# Altium PCB PultRE_8C.PcbDoc
Units mm, origin at the board's own origin, x right, y up, seen from the top; angles counter-clockwise.
Board outline 75.76 x 55.83 mm, 2 copper layers (Top Layer, Top, Bottom Layer, Bottom); 29 components, 23 nets, 96 pads, 11 vias.
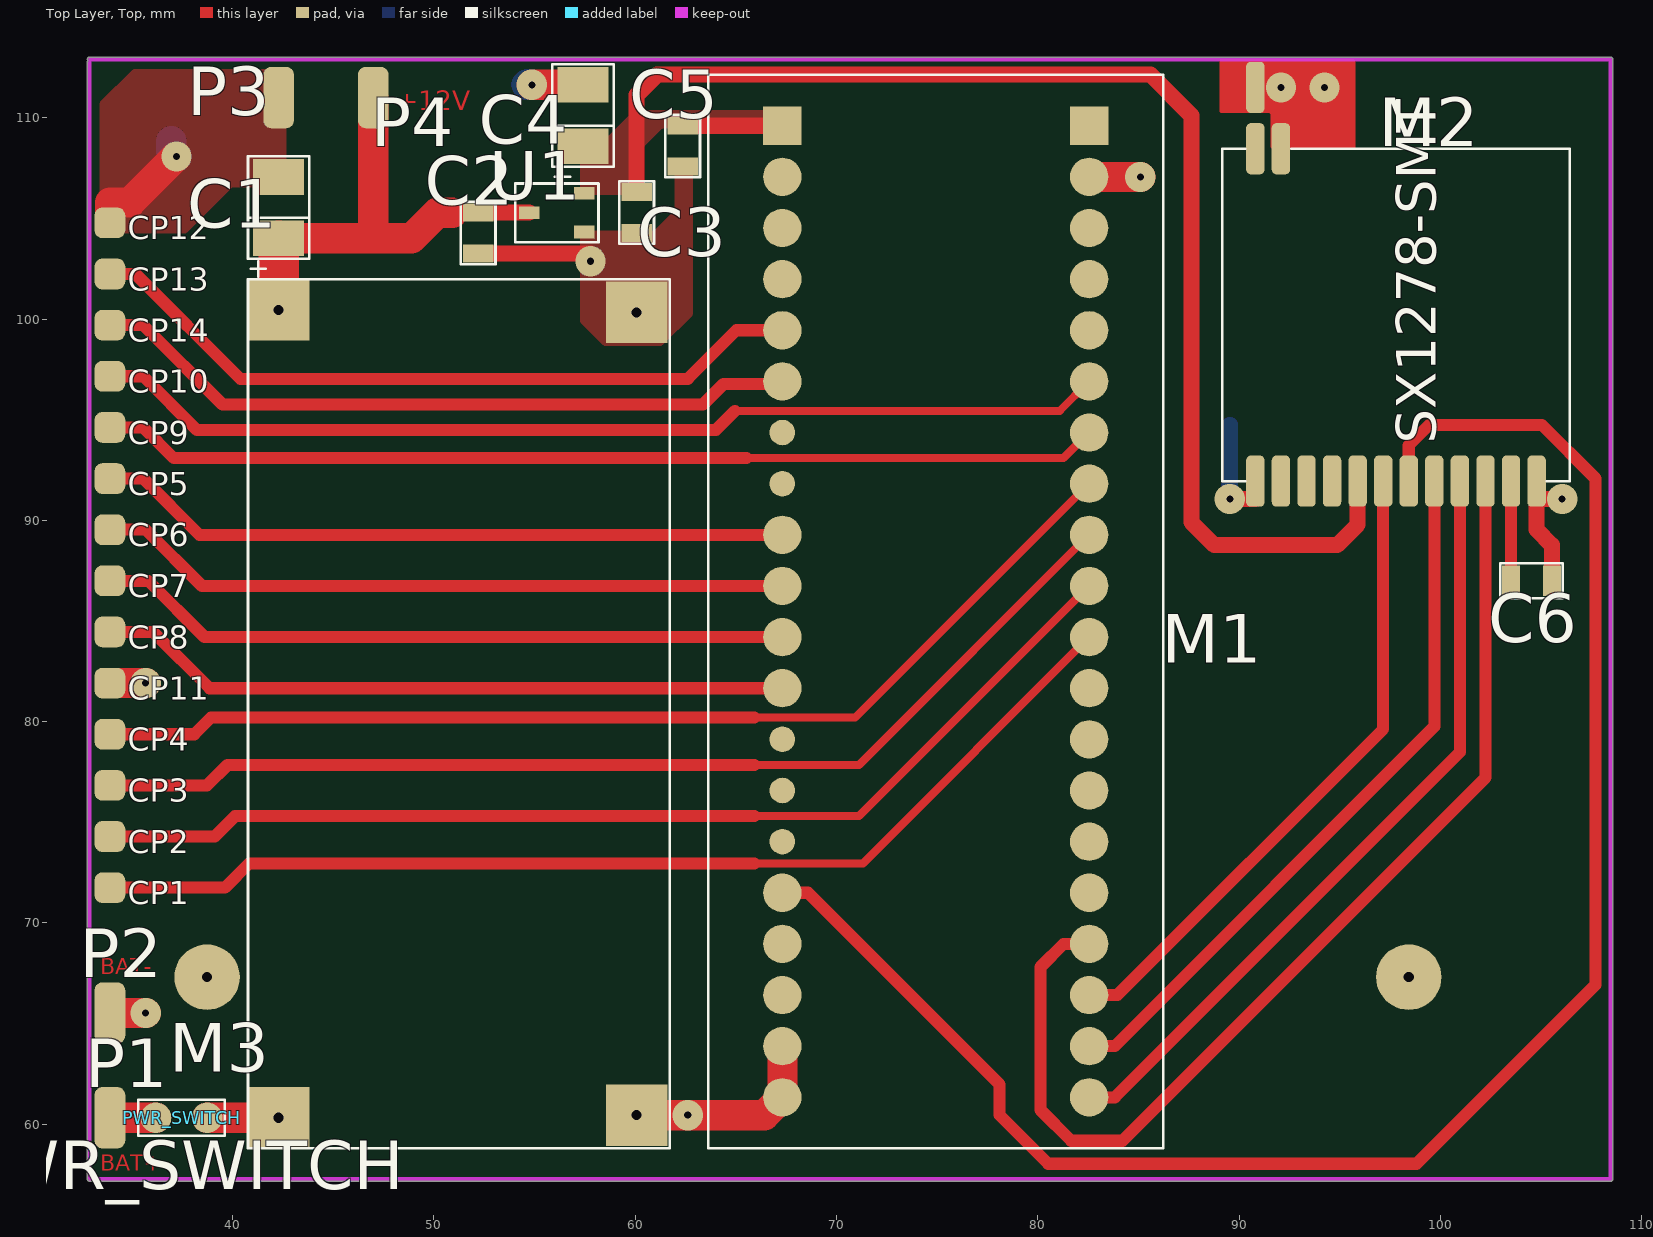
[diagram p0: Top Layer, Top view]
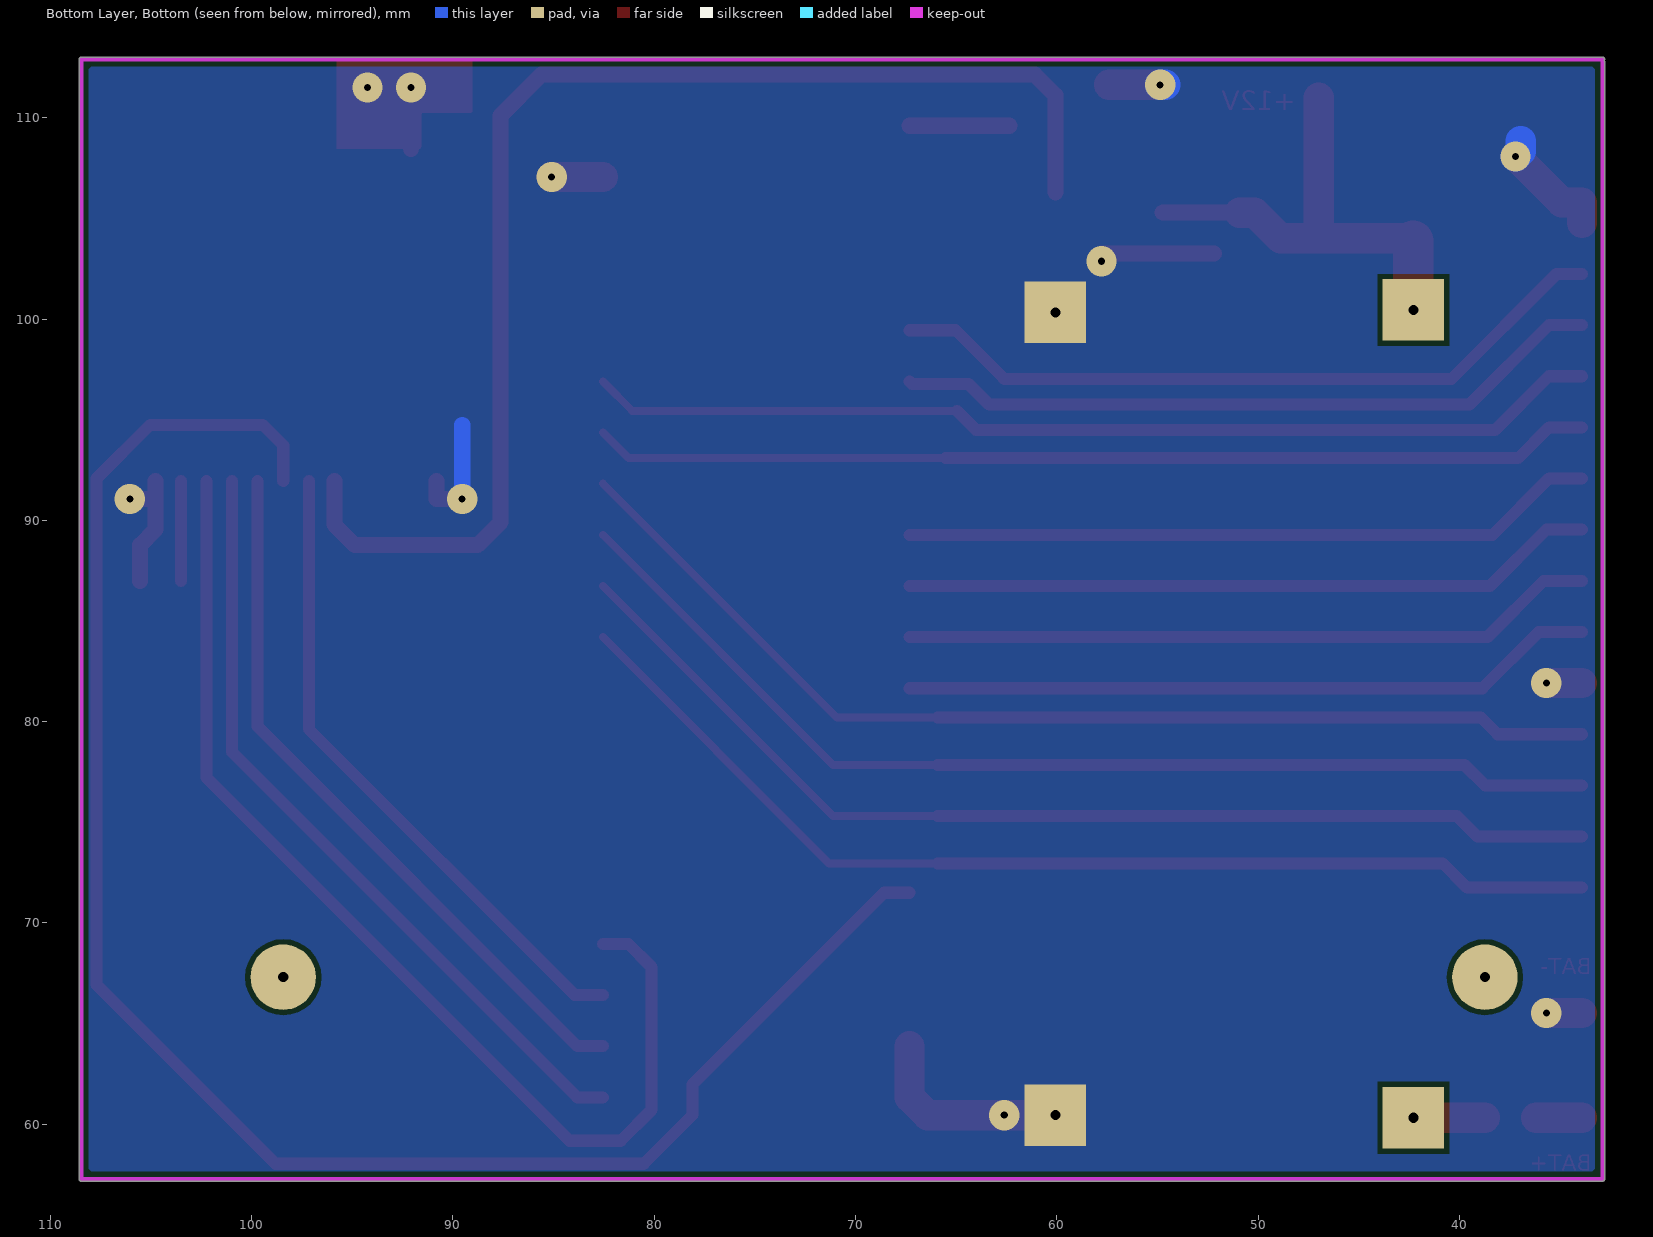
[diagram p1: Bottom Layer, Bottom view, seen from below]

## Layer stack, top to bottom
Top Solder, Top Mask: solder mask 0.0102, Solder Resist, Dk 3.5
Top Layer, Top: signal copper 0.0356
Dielectric 1: dielectric 0.32, FR-4, Dk 4.8
Bottom Layer, Bottom: signal copper 0.0356
Bottom Solder, Bot Mask: solder mask 0.0102, Solder Resist, Dk 3.5

## Board outline
32.793,57.277 32.793,112.776 cw(c32.893,112.776) 32.816,112.84 cw(c32.893,112.903) 32.893,113.003 108.458,113.003 cw(c108.458,112.903) 108.558,112.903 108.558,57.277 cw(c108.458,57.277) 108.458,57.177 32.893,57.177 cw(c32.893,57.277)

## Design rules (kind name [scope] priority, off if disabled: settings)
Clearance "Clearance_Top Layer, Top" [ExistsOnLayer('Top Layer, Top') vs ExistsOnLayer('Top Layer, Top')] p1: gap=0.15 ignorepadtopadclearanceinfootprint=FALSE except(0.2: THPad-THPad)
Clearance [All] p2: gap=0.254 ignorepadtopadclearanceinfootprint=FALSE except(0: Arc-Hole Track-Hole SMDPad-Hole THPad-Hole Via-Hole Fill-Hole Poly-Hole Region-Hole Text-Hole; 0.15: THPad-THPad; 0.2: Arc-Arc Arc-Track Arc-THPad Arc-Via Track-Track Track-THPad Track-Via THPad-Via Via-Via)
MinimumSolderMaskSliver [All] p1: minsoldermaskwidth=0
PlaneClearance [All] p1: clearance=0.254
PolygonConnect PolygonConnect_6 [IsPolygon And InNet('GND') And OnLayer('Bottom Layer, Bottom') vs IsVia] p1: connectstyle=Direct reliefconductorwidth=0.381 reliefentries=4 polygonreliefangle="90 Angle" airgapwidth=0.254
PolygonConnect PolygonConnect_5 [IsPolygon And InNet('GND') And OnLayer('Bottom Layer, Bottom') vs IsPad] p2: connectstyle=Direct reliefconductorwidth=0.381 reliefentries=4 polygonreliefangle="90 Angle" airgapwidth=0.254
PolygonConnect PolygonConnect_4 [IsPolygon And InNet('3.3V') And OnLayer('Top Layer, Top') vs IsVia] p3: connectstyle=Direct reliefconductorwidth=0.381 reliefentries=4 polygonreliefangle="90 Angle" airgapwidth=0.254
PolygonConnect PolygonConnect_3 [IsPolygon And InNet('3.3V') And OnLayer('Top Layer, Top') vs IsPad] p4: connectstyle=Direct reliefconductorwidth=0.381 reliefentries=4 polygonreliefangle="90 Angle" airgapwidth=0.254
PolygonConnect PolygonConnect_2 [IsPolygon And InNet('GND') And OnLayer('Top Layer, Top') vs IsVia] p5: connectstyle=Direct reliefconductorwidth=0.381 reliefentries=4 polygonreliefangle="90 Angle" airgapwidth=0.254
PolygonConnect PolygonConnect_1 [IsPolygon And InNet('GND') And OnLayer('Top Layer, Top') vs IsPad] p6: connectstyle=Direct reliefconductorwidth=0.381 reliefentries=4 polygonreliefangle="90 Angle" airgapwidth=0.254
PolygonConnect [All] p7: connectstyle=Relief reliefconductorwidth=0.254 reliefentries=4 polygonreliefangle="90 Angle" airgapwidth=0.254
RoutingVias [All] p1: holewidth=0.711 width=1.27 viastyle="Through Hole" minholewidth=0.711 minwidth=1.27 maxholewidth=0.711 maxwidth=1.27
SilkToSilkClearance [All] p1: silktosilkclearance=0
SilkToSolderMaskClearance [IsPad] p1: minsilkscreentomaskgap=0 clearancetoexposedcopper=TRUE
SolderMaskExpansion [All] p1: expansion=0.102 istentingtop=FALSE
Width [All] p1: maxlimit=3 minlimit=0.254 preferedwidth=0.6
26 further rules are at their usual default settings.

## Components (designator, comment, footprint, x,y, rotation, side; value= is the part's Value field where it differs from the comment)
C1 "100u" TAJHT1210 42.291,105.537 r90 top
C2 "1u" C0805 52.197,104.267 r90 top
C3 "1u" C0805 60.071,105.283 r90 top
C4 "47u" TAJHT1210 57.404,110.109 r90 top
C5 "100n" C0805 62.357,108.585 r90 top
C6 "100n" C0805 104.521,86.995 r180 top
CP1 "R1" PAD_RRX60Y60D0T 33.909,71.755 r0 top
CP2 "R2" PAD_RRX60Y60D0T 33.909,74.295 r0 top
CP3 "R3" PAD_RRX60Y60D0T 33.909,76.835 r0 top
CP4 "R4" PAD_RRX60Y60D0T 33.909,79.375 r0 top
CP5 "SWL1" PAD_RRX60Y60D0T 33.909,92.075 r0 top
CP6 "SWL2" PAD_RRX60Y60D0T 33.909,89.535 r0 top
CP7 "SWL3" PAD_RRX60Y60D0T 33.909,86.995 r0 top
CP8 "SWL4" PAD_RRX60Y60D0T 33.909,84.455 r0 top
CP9 "C1" PAD_RRX60Y60D0T 33.909,94.615 r0 top
CP10 "C2" PAD_RRX60Y60D0T 33.909,97.155 r0 top
CP11 "GND" PAD_RRX60Y60D0T 33.909,81.915 r0 top
CP12 "GND" PAD_RRX60Y60D0T 33.909,104.775 r0 top
CP13 "Fuse" PAD_RRX60Y60D0T 33.909,102.235 r0 top
CP14 "Expl" PAD_RRX60Y60D0T 33.909,99.695 r0 top
M1 "" STM32F103C8_DEV_BOARD 74.93,85.471 r0 top
M2 "" SX1278-SMT_MODULE 98.425,100.457 r90 top
M3 "" LM2596_DC-DC 51.308,80.391 r90 top
P1 "BAT+" PAD_RRX60Y120D0T 33.909,60.325 r0 top
P2 "BAT-" PAD_RRX60Y120D0T 33.909,65.532 r0 top
P3 "" PAD_RRX60Y120D0T 42.291,110.998 r0 top
P4 "" PAD_RRX60Y120D0T 46.99,110.998 r0 top
PWR_SWITCH "" 2P:EX60Y60D0T-CD100 37.465,60.325 r180 top
U1 "" SOT23A 56.134,105.283 r90 top

## Footprints (in the part's own frame and the unit in brackets; to place one, negate y for a bottom-side part, rotate by r counter-clockwise, add the part's x,y. Pads: shape width x height; smd on the part's side, far side on the other; paste and mask are expansions set on the pad)
2P:EX60Y60D0T-CD100 [mil]
  round 60 smd: 1(-50,0) 2(50,0)
  silkscreen extent -85,-35 85,35
C0805 [mil]
  rect 35x60 smd: 1(-40,0) 2(40,0)
  silkscreen extent -61,-34 61,34
LM2596_DC-DC [mil]
  rect 120x120 hole 19.68: 1(-790,355) 2(-785,-345) 3(785,-345) 4(790,355)
  silkscreen extent -850,-410 850,415
PAD_RRX60Y60D0T [mil]
  rrect50% 60x60 smd: 1(0,0)
PAD_RRX60Y120D0T [mil]
  rrect50% 60x120 smd: 1(0,0)
SOT23A [mil]
  rect 25x40 smd: 1(-38,-53) 2(38,-53) 3(0,55)
  silkscreen extent -58,-80 57,82
STM32F103C8_DEV_BOARD [mm]
  rect 1.905x1.905 smd: 1(-7.62,24.13) 40(7.62,24.13)
  round 1.905 smd: 2(-7.62,21.59) 3(-7.62,19.05) 4(-7.62,16.51) 5(-7.62,13.97) 6(-7.62,11.43) 9(-7.62,3.81) 10(-7.62,1.27) 11(-7.62,-1.27) 12(-7.62,-3.81) 16(-7.62,-13.97) 17(-7.62,-16.51) 18(-7.62,-19.05) 19(-7.62,-21.59) 20(-7.62,-24.13) 21(7.62,-24.13) 22(7.62,-21.59) 23(7.62,-19.05) 24(7.62,-16.51) 25(7.62,-13.97) 26(7.62,-11.43) 27(7.62,-8.89) 28(7.62,-6.35) 29(7.62,-3.81) 30(7.62,-1.27) 31(7.62,1.27) 32(7.62,3.81) 33(7.62,6.35) 34(7.62,8.89) 35(7.62,11.43) 36(7.62,13.97) 37(7.62,16.51) 38(7.62,19.05) 39(7.62,21.59)
  round 1.27 smd: 7(-7.62,8.89) 8(-7.62,6.35) 13(-7.62,-6.35) 14(-7.62,-8.89) 15(-7.62,-11.43)
  silkscreen extent -11.3,-26.67 11.3,26.67
SX1278-SMT_MODULE [mil]
  rrect50% 100x36 smd: 1(-335,300) 2(-335,250) 3(-335,200) 4(-335,150) 5(-335,100) 6(-335,50) 7(-335,0) 8(-335,-50) 9(-335,-100) 10(-335,-150) 11(-335,-200) 12(-335,-250) 13(315,250) 14(315,300)
  silkscreen extent -335,-315 315,365
TAJHT1210 [mil]
  rect 70x100 smd: 1(-60,0) 2(60,0)
  silkscreen extent -135,-60 100,60

## Part data
M2: "Radiomodule LoRa. 433MHz 20mW max."
M3: "Converter DC-DC Module"
U1: "Voltage Stabilizer 3.3V 100mA Iq=2uA"

## Free pads (board coordinates)
  round 3.251 hole 0.5 unplated: 9(38.735,67.31) 9(98.425,67.31)
  rrect50% 0.914x2.54 smd: 13(90.805,111.506)

## Via types
v1: diameter 1.5, hole 0.35, Top Layer, Top to Bottom Layer, Bottom, 11 vias

## Nets (pads, with @x,y where several pads share a name; then routed paths per layer and width w, separated by ;. In a path a pad name is that pad's centre, name@x,y a point inside that pad or via, vN(x,y) a via of type N, cw(c..) or ccw(c..) an arc to the next point about the centre after c; other vN are vias at no path point)
3.3V: C3.2 C4.1 C5.2 M1.1 M2.5 U1.2 | length 70.1
  Top Layer, Top w0.8: C3.2 60.071,111.125 61.087,112.141 85.598,112.141 87.63,110.109 87.63,89.916 88.773,88.773 94.869,88.773 95.885,89.789 M2.5 ; C5.2 M1.1
12V: C1.1 C2.2 M3.4 P4.1 U1.3 | length 23.6
  Top Layer, Top w0.8: 50.927,105.283 C2.2 U1.3
  Top Layer, Top w1.5: C1.1 46.863,104.013 ; P4.1 46.99,104.14 46.863,104.013 ; 50.927,105.283 50.165,105.283 48.895,104.013 46.863,104.013
  Top Layer, Top w1.778: C1.1@42.291,103.886 C1.1
  Top Layer, Top w2: M3.4 C1.1@42.291,103.886
/SS: M1.21 M2.9 | length 39
  Top Layer, Top w0.6: M1.21 83.82,61.341 100.965,78.486 M2.9
C1: CP9.1 M1.34 | length 49.8
  Top Layer, Top w0.4: 65.532,93.091 81.28,93.091 M1.34
  Top Layer, Top w0.6: CP9.1 35.56,94.615 37.084,93.091 65.532,93.091
C2: CP10.1 M1.35 | length 50.7
  Top Layer, Top w0.4: 64.96,95.441 81.09,95.441 M1.35
  Top Layer, Top w0.6: CP10.1 35.56,97.155 38.227,94.488 64.008,94.488 64.96,95.441
GND: C1.2 C2.1 C3.1 C4.2 C5.1 C6.1 CP11.1 CP12.1 M1.19 M1.20 M1.39 M2.1 M2.12 M2.13 M3.2 M3.3 P2.1 P3.1 pad.13 U1.1 | length 48
  Top Layer, Top w0.8: C2.1 57.785,103.251 v1(57.785,102.87) ; v1(89.535,91.059) 90.805,91.059 M2.1 ; pad.13 v1@91.948,111.506 ; M2.13 92.075,111.379 v1@91.948,111.506 ; v1(92.075,111.506) v1@91.948,111.506 ; M2.12 M2.12@104.775,91.059 ; C6.1 105.537,88.773 104.775,89.535 M2.12@104.775,91.059 ; v1(106.045,91.059) M2.12@104.775,91.059
  Top Layer, Top w1.5: P2.1 v1(35.687,65.532) ; CP11.1 v1(35.687,81.915) ; CP12.1 33.909,105.791 34.925,105.791 v1(37.211,108.077) ; v1(54.864,111.633) C4.2 ; M3.2 v1(62.611,60.452) 66.421,60.452 M1.20 M1.19 ; M1.39 v1(85.09,107.061)
  Bottom Layer, Bottom w0.8: 89.535,94.742 v1(89.535,91.059) v1@89.662,91.059
  Bottom Layer, Bottom w1.5: 36.957,108.839 36.957,108.331 v1(37.211,108.077) ; v1@54.61,111.633 v1(54.864,111.633)
  other v1: 94.234,111.506
IRQ_RF: M1.24 M2.10 | length 54.9
  Top Layer, Top w0.6: M1.24 81.28,68.961 80.137,67.818 80.137,60.706 81.661,59.182 84.201,59.182 102.235,77.216 M2.10
MISO: M1.23 M2.6 | length 32.4
  Top Layer, Top w0.6: M1.23 83.947,66.421 97.155,79.629 M2.6
MOSI: M1.16 M2.7 | length 88.3
  Top Layer, Top w0.6: M1.16 68.58,71.501 78.105,61.976 78.105,60.452 80.518,58.039 98.806,58.039 107.696,66.929 107.696,92.075 105.029,94.742 99.441,94.742 98.425,93.726 M2.7
NET00000: M3.1 PWR_SWITCH.1 | length 3.6
  Top Layer, Top w1.5: PWR_SWITCH.1 M3.1
NET00026: P1.1 PWR_SWITCH.2 | length 2.3
  Top Layer, Top w1.5: P1.1 PWR_SWITCH.2
NET00031: C6.2 M2.11 | length 5
  Top Layer, Top w0.6: C6.2 M2.11
R1: CP1.1 M1.30 | length 53.8
  Top Layer, Top w0.4: 65.913,72.962 71.31,72.962 M1.30
  Top Layer, Top w0.6: CP1.1 39.624,71.755 40.831,72.962 65.913,72.962
R2: CP2.1 M1.31 | length 53.8
  Top Layer, Top w0.4: 65.913,75.311 71.12,75.311 M1.31
  Top Layer, Top w0.6: CP2.1 39.116,74.295 40.132,75.311 65.913,75.311
R3: CP3.1 M1.32 | length 53.8
  Top Layer, Top w0.4: 65.913,77.851 71.12,77.851 M1.32
  Top Layer, Top w0.6: CP3.1 38.735,76.835 39.751,77.851 65.913,77.851
R4: CP4.1 M1.33 | length 53.8
  Top Layer, Top w0.4: 65.913,80.2 70.929,80.2 M1.33
  Top Layer, Top w0.6: CP4.1 38.1,79.375 38.925,80.2 65.913,80.2
SCK: M1.22 M2.8 | length 35.9
  Top Layer, Top w0.6: M1.22 83.82,63.881 99.695,79.756 M2.8
SW_EXPL: CP14.1 M1.6 | length 35.5
  Top Layer, Top w0.6: CP14.1 35.56,99.695 39.497,95.758 63.373,95.758 64.389,96.774 67.183,96.774 M1.6
SW_FUSE: CP13.1 M1.5 | length 36.6
  Top Layer, Top w0.6: CP13.1 35.179,102.235 40.386,97.028 62.611,97.028 65.024,99.441 M1.5
SWL1: CP5.1 M1.9 | length 34.6
  Top Layer, Top w0.6: CP5.1 35.56,92.075 38.354,89.281 M1.9
SWL2: CP6.1 M1.10 | length 34.6
  Top Layer, Top w0.6: CP6.1 35.687,89.535 38.481,86.741 M1.10
SWL3: CP7.1 M1.11 | length 34.6
  Top Layer, Top w0.6: CP7.1 35.814,86.995 38.608,84.201 M1.11
SWL4: CP8.1 M1.12 | length 34.6
  Top Layer, Top w0.6: CP8.1 36.068,84.455 38.862,81.661 M1.12
pads on no net: M1.2 M1.3 M1.4 M1.7 M1.8 M1.13 M1.14 M1.15 M1.17 M1.18 M1.25 M1.26 M1.27 M1.28 M1.29 M1.36 M1.37 M1.38 M1.40 M2.2 M2.3 M2.4 M2.14

## Polygon pours and split planes (outlines as drawn)
GND on Top Layer, Top "Top Layer, Top-GND" (solid, pour order 2): 37.666,104.267 37.756,104.304 39.968,106.516 40.058,106.553 41.275,106.553 42.545,106.553 42.672,106.68 42.672,112.268 42.545,112.395 35.105,112.395 35.015,112.358 33.438,110.781 33.401,110.691 33.401,104.394 33.528,104.267
3.3V on Top Layer, Top "Top Layer, Top-3.3V" (solid, pour order 1): 67.945,110.236 67.818,110.363 59.997,110.363 59.907,110.326 58.711,109.13 58.621,109.093 57.404,109.093 57.277,108.966 57.277,106.299 57.404,106.172 60.325,106.172 60.452,106.299 60.452,108.532 60.489,108.622 61.304,109.437 61.394,109.474 67.818,109.474 67.945,109.601
GND on Top Layer, Top "Top Layer, Top-GND 1" (solid, pour order 0): 62.103,107.696 61.976,107.569 61.976,105.463 61.939,105.373 60.997,104.431 60.907,104.394 57.404,104.394 57.277,104.267 57.277,99.875 57.314,99.785 58.383,98.716 58.473,98.679 61.288,98.679 61.378,98.716 62.828,100.166 62.865,100.256 62.865,107.569 62.738,107.696
GND on Bottom Layer, Bottom "Bottom Layer, Bottom-GND" (solid, pour order 3): 33.401,112.522 33.274,112.395 33.274,57.785 33.401,57.658 107.95,57.658 108.077,57.785 108.077,112.395 107.95,112.522

## Keep-outs
Keep-Out Layer, Board:
  lines w0.2: 32.893,112.776 32.893,57.277 108.458,57.277 108.458,112.903 32.893,112.903

## Other copper
Top Layer, Top:
  region net GND: 89.027,110.299 89.09,110.236 91.504,110.236 91.567,110.172 91.567,108.521 91.63,108.458 95.758,108.458 95.758,112.84 95.694,112.903 89.09,112.903 89.027,112.84
  text "+12V" at 48.133,110.363 h0.95
  text "BAT-" at 33.426,67.462 h0.8
  text "BAT+" at 33.426,57.683 h0.8

## Text inside footprints (layer, text, board x,y; h text height)
M2: Top Overlay, Top Silk "SX1278-SMT" at 99.764,93.806 h1.98 r90